# Altium PCB PCB1v3.PcbDoc
Units mm, origin at the board's own origin, x right, y up, seen from the top; angles counter-clockwise.
Board outline 58.42 x 57.15 mm, 2 copper layers (Top Layer, Bottom Layer); 52 components, 86 nets, 259 pads, 249 vias.
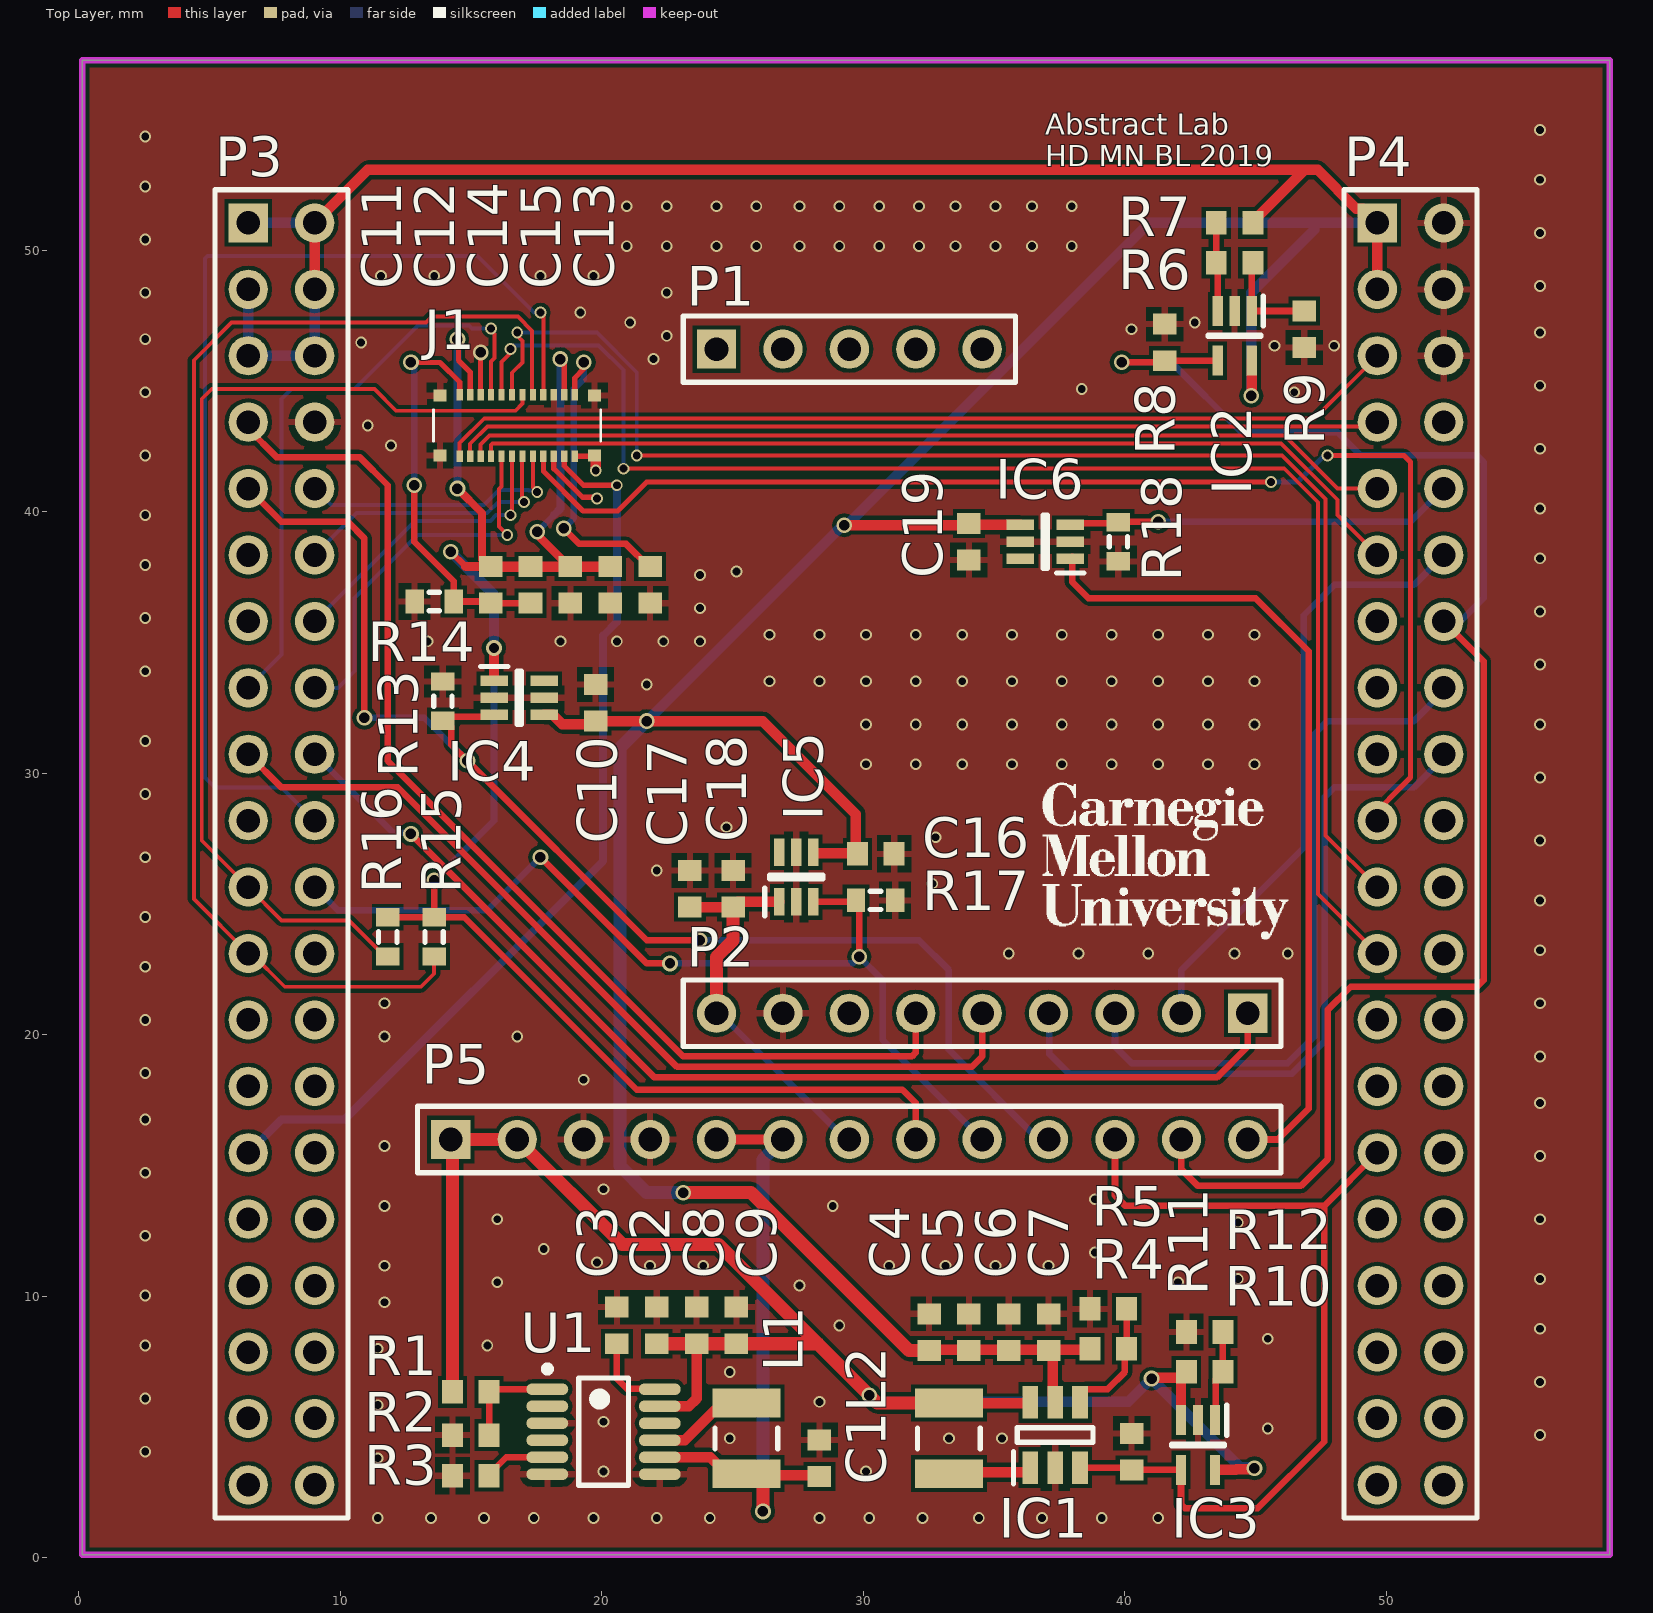
[diagram p0: Top Layer view]
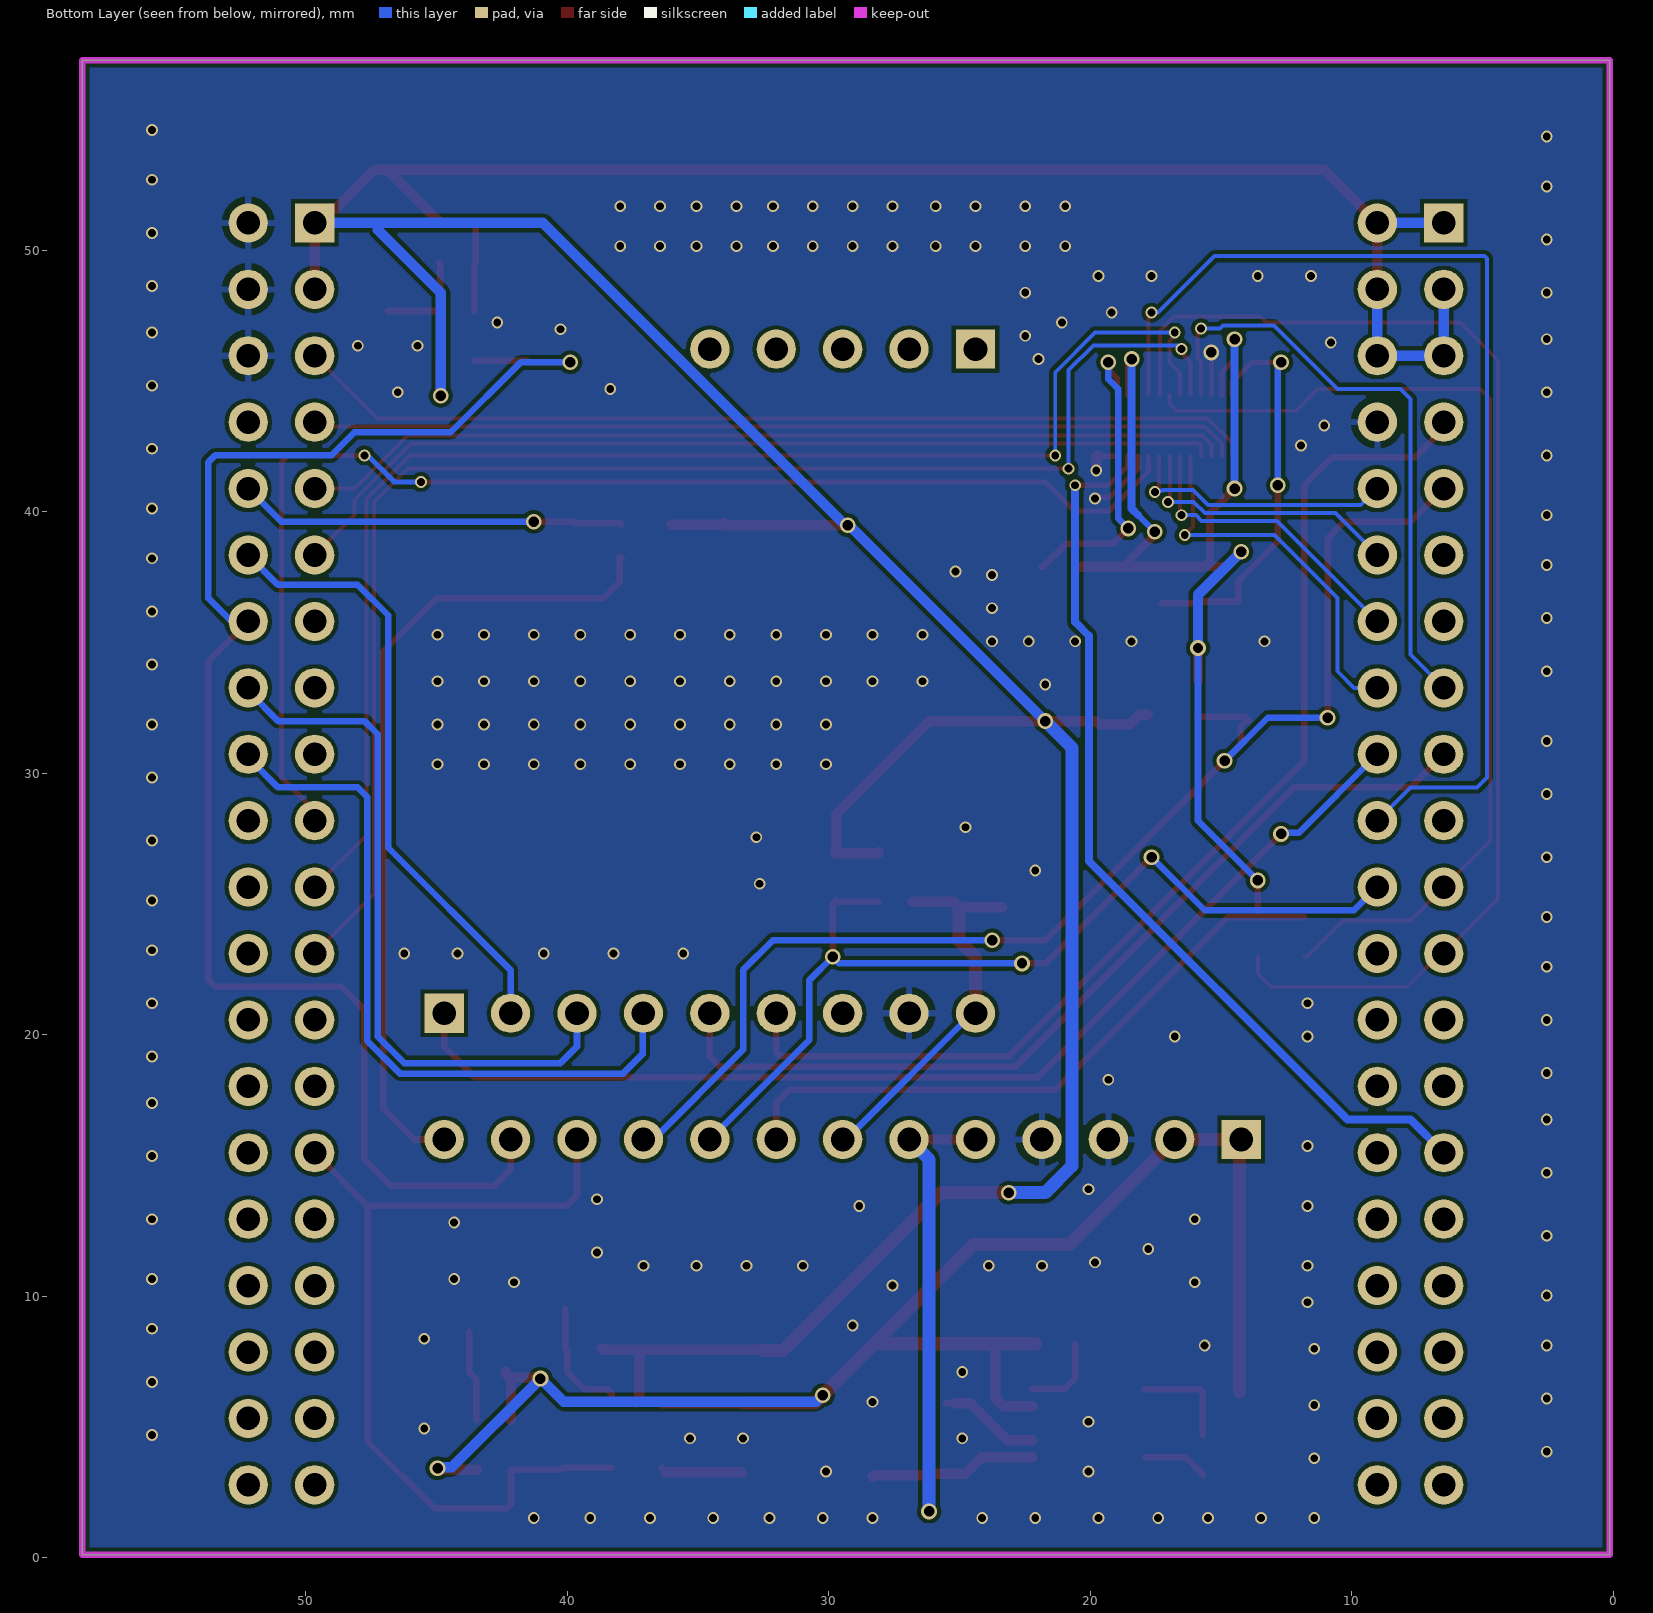
[diagram p1: Bottom Layer view, seen from below]

## Layer stack, top to bottom
Top Solder: solder mask 0.0102, Solder Resist, Dk 3.5
Top Layer: signal copper 0.0356
Dielectric 1: dielectric 0.32, FR-4, Dk 4.8
Bottom Layer: signal copper 0.0356
Bottom Solder: solder mask 0.0102, Solder Resist, Dk 3.5

## Board outline
0.127,0.127 58.547,0.127 58.547,57.277 0.127,57.277

## Design rules (kind name [scope] priority, off if disabled: settings)
Clearance [All] p1: gap=0.15 ignorepadtopadclearanceinfootprint=FALSE
PlaneConnect [All] p1: pad.planeconnectstyle=Relief pad.reliefexpansion=0.508 pad.reliefentries=4 pad.reliefconductorwidth=0.254 pad.reliefairgap=0.254 via.planeconnectstyle=Direct via.reliefexpansion=0.508 via.reliefentries=4 via.reliefconductorwidth=0.254 via.reliefairgap=0.254
PolygonConnect [All] p1: thpad.connectstyle=Relief thpad.reliefconductorwidth=0.254 thpad.reliefentries=4 thpad.polygonreliefangle="90 Angle" thpad.airgapwidth=0.254 smdpad.connectstyle=Relief smdpad.reliefconductorwidth=0.254 smdpad.reliefentries=4 smdpad.polygonreliefangle="90 Angle" smdpad.airgapwidth=0.254 via.connectstyle=Direct via.reliefconductorwidth=0.254 via.reliefentries=4 via.polygonreliefangle="90 Angle" via.airgapwidth=0.254
RoutingVias NoNet [InNet('No Net')] p1: holewidth=0.4 width=0.6 viastyle="Through Hole" minholewidth=0.3 minwidth=0.45 maxholewidth=1 maxwidth=1.15
RoutingVias Camera [(InNet('NetJ1_1') OR InNet('NetJ1_3') OR InNet('NetJ1_5') OR InNet('NetJ1_7') OR InNet('NetJ1_9') OR InNet('NetJ1_11') OR InNet('NetJ1_13') OR InNet('NetJ1_15') OR InNet('NetJ1_17') OR InNet('NetJ1_17') OR InNet('NetJ1_21')) OR InNet('NetJ1_2') OR InNet('NetJ1_8') OR InNet('NetJ1_10') OR InNet('NetJ1_12') OR InNet('NetJ1_14') OR InNet('NetJ1_16') OR InNet('NetJ1_18') OR InNet('NetC9_2') OR InNet('NetC12_2')] p2: holewidth=0.3 width=0.45 viastyle="Through Hole" minholewidth=0.3 minwidth=0.45 maxholewidth=6.3 maxwidth=7.45
RoutingVias RoutingVias_1 [All] p3: holewidth=0.4 width=0.6 viastyle="Through Hole" minholewidth=0.3 minwidth=0.45 maxholewidth=6.3 maxwidth=7.45
SolderMaskExpansion [All] p1: expansion=0.102
Width Power [(InNet('VCC') OR InNet('GND') OR InNet('VCAP')OR InNet('V_HARVEST'))] p1: maxlimit=1 minlimit=0.2 preferedwidth=0.4
Width "Camera Socket" [(InNet('NetJ1_1') OR InNet('NetJ1_3') OR InNet('NetJ1_5') OR InNet('NetJ1_7') OR InNet('NetJ1_9') OR InNet('NetJ1_11') OR InNet('NetJ1_13') OR InNet('NetJ1_15') OR InNet('NetJ1_17') OR InNet('NetJ1_17') OR InNet('NetJ1_21')) OR InNet('NetJ1_2') OR InNet('NetJ1_8') OR InNet('NetJ1_10') OR InNet('NetJ1_12') OR InNet('NetJ1_14') OR InNet('NetJ1_16') OR InNet('NetJ1_18') OR InNet('NetC9_2') OR InNet('NetC12_2')] p2: maxlimit=0.3 minlimit=0.15 preferedwidth=0.15
Width [All] p3: maxlimit=1 minlimit=0.15 preferedwidth=0.25
29 further rules are at their usual default settings.

## Components (designator, comment, footprint, x,y, rotation, side; value= is the part's Value field where it differs from the comment)
C1 "Cap" 1608[0603] 28.321,3.81 r270 top value=10uF
C2 "Cap" 1608[0603] 22.098,8.89 r270 top value=10uF
C3 "Cap" 1608[0603] 20.574,8.89 r270 top value=1uF
C4 "Cap" 1608[0603] 32.512,8.636 r270 top value=0.1uF
C5 "Cap" 1608[0603] 34.036,8.636 r270 top value=1uF
C6 "Cap" 1608[0603] 35.56,8.636 r270 top value=10uF
C7 "Cap" 1608[0603] 37.084,8.636 r270 top value=10uF
C8 "Cap" 1608[0603] 23.622,8.89 r270 top value=0.1uF
C9 "Cap" 1608[0603] 25.146,8.89 r270 top value=1uF
C10 "Cap" 1608[0603] 19.76,32.704 r270 top value=10uF
C11 "Cap" 1608[0603] 15.748,37.211 r90 top value=0.1uF
C12 "Cap" 1608[0603] 17.272,37.211 r90 top value=10uF
C13 "Cap" 1608[0603] 21.844,37.211 r90 top value=0.1uF
C14 "Cap" 1608[0603] 18.796,37.211 r90 top value=0.1uF
C15 "Cap" 1608[0603] 20.32,37.211 r90 top value=10uF
C16 "Cap" 1608[0603] 30.48,26.924 r180 top value=10uF
C17 "Cap" 1608[0603] 23.368,25.592 r270 top value=10uF
C18 "Cap" 1608[0603] 25.019,25.589 r270 top value=1uF
C19 "Cap" 1608[0603] 34.036,38.862 r90 top value=10uF
IC1 "TPS61070DDCR" SOT95P280X110-6N 37.338,4.699 r90 top
IC2 "MIC841HYC5-TR" SOT65P210X110-5N 44.196,46.736 r270 top
IC3 "MIC841HYC5-TR" SOT65P210X110-5N 42.799,4.318 r270 top
IC4 "SIP32431DR3-T1GE3" SOT65P210X110-6N 16.839,32.893 r0 top
IC5 "SIP32431DR3-T1GE3" SOT65P210X110-6N 27.432,26.035 r90 top
IC6 "SIP32431DR3-T1GE3" SOT65P210X110-6N 36.957,38.862 r180 top
J1 "503772-2420" 5037722410 16.764,43.307 r0 top
L1 "Inductor" C1210 25.527,4.572 r90 top value=10uH
L2 "Inductor" C1210 33.274,4.572 r90 top value=4.7uH
P1 "Header 5" HDR1X5 24.384,46.228 r0 top locked
P2 "Header 9" HDR1X9 44.704,20.828 r180 top locked
P3 "Header 20X2" HDR2X20 6.477,51.054 r270 top locked
P4 "Header 20X2" HDR2X20 49.657,51.054 r270 top locked
P5 "Header 13" HDR1X13 14.224,16.002 r0 top
R1 "Res3" 1608[0603] 14.986,6.35 r180 top value=2M
R2 "Res3" 1608[0603] 14.986,4.699 r0 top value=1M
R3 "Res3" 1608[0603] 14.986,3.14 r0 top value=150K
R4 "Res3" 1608[0603] 39.37,8.001 r180 top value=1.96M
R5 "Res3" 1608[0603] 39.37,9.525 r0 top value=392K
R6 "Res3" 1608[0603] 44.196,49.53 r180 top value=453k
R7 "Res3" 1608[0603] 44.196,51.054 r0 top value=1.3M
R8 "Res3" 1608[0603] 41.529,46.482 r270 top value=2M
R9 "Res3" 1608[0603] 46.863,46.99 r90 top value=1.24M
R10 "Res3" 1608[0603] 43.053,7.115 r180 top value=1.74M
R11 "Res3" 1608[0603] 40.259,4.064 r270 top value=2M
R12 "Res3" 1608[0603] 43.053,8.639 r0 top value=1.24M
R13 "Res3" J1-0603 13.918,32.766 r270 top value=2M
R14 "Res3" J1-0603 13.589,36.576 r180 top value=0
R15 "Res3" J1-0603 13.589,23.749 r90 top value=4.7k
R16 "Res3" J1-0603 11.811,23.749 r90 top value=4.7k
R17 "Res3" J1-0603 30.468,25.146 r180 top value=2M
R18 "Res3" J1-0603 39.751,38.862 r90 top value=2M
U1 "LTC3105EMS#PBF" LT-MS-12_N 20.066,4.826 r0 top

## Footprints (in the part's own frame and the unit in brackets; to place one, negate y for a bottom-side part, rotate by r counter-clockwise, add the part's x,y. Pads: shape width x height; smd on the part's side, far side on the other; paste and mask are expansions set on the pad)
1608[0603] [mm] "Chip Capacitor, Body 1.6x0.8mm, IPC High Density"
  rect 0.8x0.9 smd: 1(-0.7,0) 2(0.7,0)
  body extent -0.87,-0.48 0.87,0.48, height 1.3
5037722410 [mm]
  rect 0.24x0.45 smd: 1(-2.2,-1.175) 2(-2.2,1.175) 3(-1.8,-1.175) 4(-1.8,1.175) 5(-1.4,-1.175) 6(-1.4,1.175) 7(-1,-1.175) 8(-1,1.175) 9(-0.6,-1.175) 10(-0.6,1.175) 11(-0.2,-1.175) 12(-0.2,1.175) 13(0.2,-1.175) 14(0.2,1.175) 15(0.6,-1.175) 16(0.6,1.175) 17(1,-1.175) 18(1,1.175) 19(1.4,-1.175) 20(1.4,1.175) 21(1.8,-1.175) 22(1.8,1.175) 23(2.2,-1.175) 24(2.2,1.175)
  rect 0.5x0.47 smd: FN1(-2.95,1.145) FN2(-2.95,-1.145) FN3(2.95,-1.145) FN4(2.95,1.145)
  silkscreen extent -3.2,-0.6 3.2,0.6
C1210 [mm] "Chip Capacitor, Body 3.2x2.5mm, IPC High Density"
  rect 1.1x2.6 smd: 1(-1.35,0) 2(1.35,0)
  silkscreen extent -0.4,-1.2 0.4,1.2, body extent -1.7,-1.35 1.7,1.35, height 1.3
HDR1X5 [mm] "Connector; Header; 5 Position"
  rect 1.5x1.5 hole 0.9: 1(0,0)
  round 1.5 hole 0.9: 2(2.54,0) 3(5.08,0) 4(7.62,0) 5(10.16,0)
  silkscreen extent -1.27,-1.27 11.43,1.27
HDR1X9 [mm] "Connector; Header; 9 Position"
  rect 1.5x1.5 hole 0.9: 1(0,0)
  round 1.5 hole 0.9: 2(2.54,0) 3(5.08,0) 4(7.62,0) 5(10.16,0) 6(12.7,0) 7(15.24,0) 8(17.78,0) 9(20.32,0)
  silkscreen extent -1.27,-1.27 21.59,1.27
HDR1X13 [mm] "Connector; Header; 13 Position"
  rect 1.5x1.5 hole 0.9: 1(0,0)
  round 1.5 hole 0.9: 2(2.54,0) 3(5.08,0) 4(7.62,0) 5(10.16,0) 6(12.7,0) 7(15.24,0) 8(17.78,0) 9(20.32,0) 10(22.86,0) 11(25.4,0) 12(27.94,0) 13(30.48,0)
  silkscreen extent -1.27,-1.27 31.75,1.27
HDR2X20 [mm] "Connector; Header; 20x2 Position"
  rect 1.5x1.5 hole 0.9: 1(0,0)
  round 1.5 hole 0.9: 2(0,2.54) 3(2.54,0) 4(2.54,2.54) 5(5.08,0) 6(5.08,2.54) 7(7.62,0) 8(7.62,2.54) 9(10.16,0) 10(10.16,2.54) 11(12.7,0) 12(12.7,2.54) 13(15.24,0) 14(15.24,2.54) 15(17.78,0) 16(17.78,2.54) 17(20.32,0) 18(20.32,2.54) 19(22.86,0) 20(22.86,2.54) 21(25.4,0) 22(25.4,2.54) 23(27.94,0) 24(27.94,2.54) 25(30.48,0) 26(30.48,2.54) 27(33.02,0) 28(33.02,2.54) 29(35.56,0) 30(35.56,2.54) 31(38.1,0) 32(38.1,2.54) 33(40.64,0) 34(40.64,2.54) 35(43.18,0) 36(43.18,2.54) 37(45.72,0) 38(45.72,2.54) 39(48.26,0) 40(48.26,2.54)
  silkscreen extent -1.27,-1.27 49.53,3.81
J1-0603 [mm] "Chip Resistor, Body 1.6x0.8mm, IPC High Density"
  rect 0.7x0.9 smd: 1(-0.75,0) 2(0.75,0)
  silkscreen extent -0.2,-0.35 0.2,0.35, body extent -0.85,-0.48 0.85,0.48, height 0.9
LT-MS-12_N [mm] "SOP, 12-Leads, Body 4.1x3.1mm, Pitch 0.65mm, IPC Medium Density"
  oval 1.6x0.45 smd: 1(-2.15,1.625) 2(-2.15,0.975) 3(-2.15,0.325) 4(-2.15,-0.325) 5(-2.15,-0.975) 6(-2.15,-1.625) 7(2.15,-1.625) 8(2.15,-0.975) 9(2.15,-0.325) 10(2.15,0.325) 11(2.15,0.975) 12(2.15,1.625)
  silkscreen extent -2.27,-2.05 0.95,2.52, body extent -1.55,-2.05 1.55,2.05, height 1.1
SOT65P210X110-5N [mm]
  rect 1.15x0.4 smd: 1(-0.95,0.65) 2(-0.95,0) 3(-0.95,-0.65) 4(0.95,-0.65) 5(0.95,0.65)
  silkscreen extent -1.53,-1.01 0.03,1.1, body extent -1.05,-1.01 1.05,1.01, height 1.1
SOT65P210X110-6N [mm]
  rect 1.05x0.4 smd: 1(-0.95,0.65) 2(-0.95,0) 3(-0.95,-0.65) 4(0.95,-0.65) 5(0.95,0) 6(0.95,0.65)
  silkscreen extent -1.48,-1.01 0.08,1.2, body extent -1.05,-1.01 1.05,1.01, height 1.1
SOT95P280X110-6N [mm]
  rect 1.25x0.6 smd: 1(-1.25,0.95) 2(-1.25,0) 3(-1.25,-0.95) 4(1.25,-0.95) 5(1.25,0) 6(1.25,0.95)
  silkscreen extent -1.88,-1.45 0.28,1.6, body extent -1.4,-1.45 1.4,1.45, height 1.1

## Part data
C1 C2 C3 C4 C5 C6 C7 C8 C9 C10 C11 C12 C13 C14 C15 C16 C17 C18 C19: "CAP CER 6.3V X5R/X7R 0603", PackageDescription="Chip Capacitor, Body 1.6x0.8mm, IPC High Density", PackageReference=0603, Publisher="Altium Limited"
IC1: "90% Efficient Synchronous Boost Converter With 600-mA Switch", Manufacturer_Name="Texas Instruments", Mouser Part Number=595-TPS61070DDCR, ComponentLink1Description="Manufacturer URL", ComponentLink1URL=www.ti.com, ComponentLink2Description="Package Specification", ComponentLink2URL=http://www.ti.com/lit/ml/mpds026l/mpds026l.pdf, ComponentLink3Description=Datasheet, ComponentLink3URL=http://www.ti.com/lit/ds/symlink/tps61070.pdf, Datasheet Link=http://www.ti.com/lit/ds/symlink/tps61070.pdf, Height=1.1mm, Manufacturer_Part_Number=TPS61070DDCR, Mouser Price/Stock=https://www.mouser.com/Search/Refine.aspx?Keyword=595-TPS61070DDCR
IC2 IC3: "Comparator with 1.25% Reference and Adjustable Hysteresis", Manufacturer_Name=Microchip, Mouser Part Number=998-MIC841HYC5TR, RS Part Number=1654292, ComponentLink2Description="Package Specification", ComponentLink2URL=http://94.251.15.129/chip/ChipDoc.nsf/Package/4907A36056EE3CAB47257B96006A2837!OpenDocument, Datasheet Link=http://ww1.microchip.com/downloads/en/devicedoc/20005758a.pdf, Height=1.1mm, Manufacturer_Part_Number=MIC841HYC5-TR, RS Price/Stock=http://uk.rs-online.com/web/p/products/1654292
  IC2: ComponentLink1Description="Manufacturer URL", ComponentLink1URL=https://www.microchip.com, ComponentLink3Description=Datasheet, ComponentLink3URL=http://ww1.microchip.com/downloads/en/devicedoc/20005758a.pdf
  IC3: ComponentLink1Description=Datasheet, ComponentLink1URL=http://ww1.microchip.com/downloads/en/devicedoc/20005758a.pdf, ComponentLink3Description="Manufacturer URL", ComponentLink3URL=https://www.microchip.com
IC4 IC5 IC6: "10 pA, Ultra Low Leakage and Quiescent Current, / Load Switch with Reverse Blocking", Manufacturer_Name=Vishay, Mouser Part Number=781-SIP32431DR3-GE3, ComponentLink1Description=Datasheet, ComponentLink1URL=https://www.vishay.com/docs/66597/sip32431.pdf, ComponentLink2Description="Package Specification", ComponentLink2URL=https://www.vishay.com/docs/71154/71154.pdf, ComponentLink3Description="Manufacturer URL", ComponentLink3URL=https://www.vishay.com, Datasheet Link=https://componentsearchengine.com/Datasheets/1/SIP32431DR3-T1GE3.pdf, Height=1.1mm, Manufacturer_Part_Number=SIP32431DR3-T1GE3, Mouser Price/Stock=https://www.mouser.com/Search/Refine.aspx?Keyword=781-SIP32431DR3-GE3
J1: library part 503772-2410, "SlimStack Board-to-Board Connector. 0.40mm Pitch, B8 Series, Receptacle, 0.80mm Mated Height, 2.50mm Mated Width, 24 Circuits", Manufacturer_Name=Molex, Mouser Part Number=538-503772-2410, ComponentLink1Description="Package Specification", ComponentLink1URL=https://www.molex.com/pdm_docs/sd/5037722420_sd.pdf, ComponentLink2Description="Manufacturer URL", ComponentLink2URL=https://www.molex.com, ComponentLink3Description=Datasheet, ComponentLink3URL=https://www.molex.com/webdocs/datasheets/pdf/en-us/5037722420_PCB_RECEPTACLES.pdf, Datasheet Link=https://componentsearchengine.com/Datasheets/1/503772-2410.pdf, Height=0.76mm, Manufacturer_Part_Number=503772-2410, Mouser Price/Stock=https://www.mouser.com/Search/Refine.aspx?Keyword=538-503772-2410
P1: "Header, 5-Pin", LatestRevisionDate=17-Jul-2002, LatestRevisionNote="Re-released for DXP Platform.", Publisher="Altium Limited"
P2: "Header, 9-Pin", LatestRevisionDate=17-Jul-2002, LatestRevisionNote="Re-released for DXP Platform.", Publisher="Altium Limited"
P3 P4: "Header, 20-Pin, Dual row", LatestRevisionDate=17-Jul-2002, LatestRevisionNote="Re-released for DXP Platform.", Publisher="Altium Limited"
P5: "Header, 13-Pin", LatestRevisionDate=17-Jul-2002, LatestRevisionNote="Re-released for DXP Platform.", Publisher="Altium Limited"
R1 R2 R3 R4 R5 R6 R7 R8 R9 R10 R11 R12 R13 R14 R15 R16 R17 R18: "RES 1/10W 1% 0603 SMD", PackageDescription="Chip Resistor, Body 1.6x0.8mm, IPC High Density", PackageReference=0603, Publisher="Altium Limited"
U1: library part CMP-0473-00104-1, "400 mA Step-Up DC/DC Converter with Maximum Power Point Control and 250 mV Start-Up, 12-pin SOP (MS-12), -40 to 85 degC, Pb-Free", Manufacturer="Linear Technology", ComponentLink1Description="Manufacturer URL", ComponentLink1URL=http://www.linear.com/, ComponentLink2Description=Datasheet, ComponentLink2URL=https://www.analog.com/media/en/technical-documentation/data-sheets/3105fb.pdf, ComponentLink3Description="Package Specification", ComponentLink3URL=http://cds.linear.com/docs/en/packaging/05081668_A_MS12.pdf, DatasheetVersion="Rev. A", Energy Source=Solar, Mounting Technology="Surface Mount", Number of Outputs=1, PackageDescription="12-Pin Plastic MSOP, Body 4.039 x 3 mm, Pitch 0.65 mm", PackageReference=MS-12, PackageVersion="Rev. A, 05/2013", PartNumber=LTC3105EMS#PBF, RoHS=TRUE, Topology=Boost, Vin Max(V)=5, Vin Min(V)=0.225, Vout Max(V)=5.25
L1: Code_IEC=3225, Code_JEITA=1210, LatestRevisionDate=29-May-2009, LatestRevisionNote="IPC-7351 Footprint Added.", PackageDescription="Chip Inductor", PackageReference=1210, Part=CBC3225T100KR, Published=8-Jun-2000, Publisher="Altium Limited"
L2: Code_IEC=3225, Code_JEITA=1210, LatestRevisionDate=29-May-2009, LatestRevisionNote="IPC-7351 Footprint Added.", PackageDescription="Chip Inductor", PackageReference=1210, Part=CBC3225T4R7MR, Published=8-Jun-2000, Publisher="Altium Limited"

## Via types
v1: diameter 0.45, hole 0.3, Top Layer to Bottom Layer, tented both sides, 220 vias
v2: diameter 0.6, hole 0.4, Top Layer to Bottom Layer, tented both sides, 29 vias

## Nets (pads, with @x,y where several pads share a name; then routed paths per layer and width w, separated by ;. In a path a pad name is that pad's centre, name@x,y a point inside that pad or via, vN(x,y) a via of type N, cw(c..) or ccw(c..) an arc to the next point about the centre after c; other vN are vias at no path point)
CAM_EN: IC4.3 P3.9 P5.10 R13.2 | length 50.8
  Top Layer w0.25: P3.9 7.747,39.624 10.287,39.624 10.922,38.989 v2(10.922,32.131) ; IC4.3 15.814,32.168 14.07,32.168 R13.2 14.018,32.016 14.243,31.791 14.243,31.096 v2(14.859,30.48) 21.717,23.622 v2(23.749,23.622)
  Bottom Layer w0.25: v2(10.922,32.131) 13.208,32.131 v2(14.859,30.48) ; v2(23.749,23.622) 32.131,23.622 33.274,22.479 33.274,19.431 36.703,16.002 P5.10
CAM_VCC: C11.2 C12.2 C14.2 C15.2 IC4.1 J1.4 J1.22 P5.8 R15.2 R16.2 | length 69.5
  Top Layer w0.2: v2(14.478,46.609) 14.52,46.567 14.52,45.792 14.964,45.348 J1.4 ; v2(18.415,45.847) 18.564,45.698 J1.22
  Top Layer w0.25: R16.2 R15.2 ; v2(13.589,25.908) R15.2 ; v2(14.224,38.481) 14.794,37.911 ; C11.2@15.423,38.186 15.698,37.911 C11.2 ; IC4.1@15.875,33.557 IC4.1 ; v2(17.526,39.243) 17.593,39.176 v2@17.593,39.064 ; C14.2@18.746,37.911 C14.2 ; P5.8 32.004,17.399 31.496,17.907 21.336,17.907 14.738,24.505 13.595,24.505 R15.2
  Top Layer w0.3: v2(14.478,40.894) 15.423,39.949 C11.2@15.423,38.186 ; v2@17.593,39.064 C14.2@18.746,37.911
  Top Layer w0.35: 14.794,37.911 C11.2@15.698,37.911
  Top Layer w0.4: C11.2 C12.2 C14.2@18.746,37.911 ; IC4.1@15.875,33.557 v2(15.875,34.798) ; C14.2 C15.2
  Bottom Layer w0.25: v2(13.589,25.908) 15.875,28.194 v2(15.875,34.798) ; v2(17.526,39.243) 18.161,39.878
  Bottom Layer w0.3: v2(14.478,40.894) v2(14.478,46.609) ; 18.161,39.878 18.415,40.132 v2(18.415,45.847)
  Bottom Layer w0.4: v2(14.224,38.481) 15.875,36.83 v2(15.875,34.798)
GND: C1.1 C2.1 C3.1 C4.1 C5.1 C6.1 C7.1 C8.1 C9.1 C10.1 C13.1 C14.1 C15.1 C16.1 C17.1 C18.1 C19.1 IC1.2 IC2.2 IC3.2 IC4.2 IC4.5 IC5.2 IC5.5 IC6.2 IC6.5 J1.6 J1.19 J1.20 J1.23 J1.FN1 J1.FN2 J1.FN3 J1.FN4 P2.8 P3.8 P4.2 P4.4 P4.6 P5.3 P5.4 R2.1 R3.1 R5.1 R8.1 R9.1 R11.1 R12.1 R13.1 R14.2 R17.1 R18.1 U1.3 U1.6 U1.7 | length 5.6
  Top Layer w0.2: J1.6 v2@15.364,46.098 ; J1.19 18.164,41.653 19.256,40.561 19.764,40.561 v1(19.812,40.513) ; J1.23 J1.FN3@19.714,42.132
  Top Layer w0.254: v2@15.364,46.098 v2(15.367,46.101)
  Top Layer w0.4: J1.FN3 19.729,42.162 19.764,42.127 v1(19.764,41.591)
  other v1: 11.43,1.524 13.462,1.524 15.494,1.524 17.399,1.524 19.685,1.524 22.098,1.524 24.13,1.524 28.321,1.524 30.226,1.524 32.258,1.524 34.417,1.524 36.83,1.524 39.116,1.524 41.275,1.524 20.066,3.302 30.099,3.302 11.43,3.81 2.54,4.064 24.892,4.572 33.274,4.572 35.306,4.572 55.88,4.699 45.466,4.953 20.066,5.207 11.43,5.842 28.321,5.969 2.54,6.096 55.88,6.731 24.892,7.112 11.43,8.001 2.54,8.128 15.621,8.128 45.466,8.382 55.88,8.763 29.083,8.89 11.684,9.779 2.54,10.033 27.559,10.414 16.002,10.541 42.037,10.541 44.323,10.668 55.88,10.668 11.684,11.176 21.844,11.176 23.876,11.176 30.988,11.176 33.147,11.176 35.052,11.176 37.084,11.176 19.812,11.303 38.862,11.684 17.78,11.811 2.54,12.319 44.323,12.827 16.002,12.954 55.88,12.954 11.684,13.462 28.829,13.462 38.862,13.716 20.066,14.097 2.54,14.732 55.88,15.367 11.684,15.748 2.54,16.764 55.88,17.399 19.304,18.288 2.54,18.542 55.88,19.177 11.684,19.939 16.764,19.939 2.54,20.574 11.684,21.209 55.88,21.209 2.54,22.606 35.56,23.114 38.227,23.114 40.894,23.114 44.196,23.114 46.228,23.114 55.88,23.241 2.54,24.511 55.88,25.146 32.639,25.781 22.098,26.289 2.54,26.797 55.88,27.432 32.766,27.559 24.765,27.94 2.54,29.21 55.88,29.845 30.099,30.353 32.004,30.353 33.782,30.353 35.687,30.353 37.592,30.353 39.497,30.353 41.275,30.353 43.18,30.353 44.958,30.353 2.54,31.242 30.099,31.877 32.004,31.877 33.782,31.877 35.687,31.877 37.592,31.877 39.497,31.877 41.275,31.877 43.18,31.877 44.958,31.877 55.88,31.877 21.717,33.401 26.416,33.528 28.321,33.528 30.099,33.528 32.004,33.528 33.782,33.528 35.687,33.528 37.592,33.528 39.497,33.528 41.275,33.528 43.18,33.528 44.958,33.528 2.54,33.909 55.88,34.163 13.335,35.052 18.415,35.052 20.574,35.052 22.352,35.052 23.749,35.052 26.416,35.306 28.321,35.306 30.099,35.306 32.004,35.306 33.782,35.306 35.687,35.306 37.592,35.306 39.497,35.306 41.275,35.306 43.18,35.306 44.958,35.306 2.54,35.941 55.88,36.195 23.749,36.322 23.749,37.592 25.146,37.719 2.54,37.973 55.88,38.227 2.54,39.878 55.88,40.132 2.54,42.164 55.88,42.418 11.938,42.545 11.049,43.307 2.54,44.577 46.482,44.577 38.354,44.704 55.88,44.831 21.971,45.847 45.72,46.355 48.006,46.355 10.795,46.482 2.54,46.609 22.479,46.736 55.88,46.863 40.259,46.99 21.082,47.244 42.672,47.244 19.177,47.625 2.54,48.387 22.479,48.387 55.88,48.641 11.557,49.022 13.589,49.022 17.653,49.022 19.685,49.022 20.955,50.165 22.479,50.165 24.384,50.165 25.908,50.165 27.559,50.165 29.083,50.165 30.607,50.165 32.131,50.165 33.528,50.165 35.052,50.165 36.449,50.165 37.973,50.165 2.54,50.419 55.88,50.673 20.955,51.689 22.479,51.689 24.384,51.689 25.908,51.689 27.559,51.689 29.083,51.689 30.607,51.689 32.131,51.689 33.528,51.689 35.052,51.689 36.449,51.689 37.973,51.689 2.54,52.451 55.88,52.705 2.54,54.356 55.88,54.61
MSP_RST: IC2.4 P4.14 P5.12 R8.2 | length 60.3
  Top Layer w0.25: v2(39.878,45.72) 41.467,45.72 R8.2 41.533,45.786 IC2.4 ; P5.12@42.291,16.002 P5.12 42.164,14.859 42.799,14.224 46.736,14.224 47.752,15.24 47.752,20.955 48.641,21.844 53.467,21.844 53.721,22.098 53.721,34.29 P4.14
  Bottom Layer w0.25: v2(39.878,45.72) 41.783,45.72 44.45,43.053 48.133,43.053 49.022,42.164 53.467,42.164 53.721,41.91 53.721,36.703 52.832,35.814 P4.14
NetC3_2: C3.2 U1.12 | length 3.1
  Top Layer w0.25: C3.2 20.574,6.858 20.955,6.477 22.19,6.477 U1.12
NetC11_1: C11.1 C12.1 J1.2 R14.1 | length 15.4
  Top Layer w0.2: v2(12.7,45.72) 13.812,45.72 14.564,44.968 J1.2
  Top Layer w0.25: v2(12.827,41.021) 12.827,38.862 14.339,37.35 R14.1 15.683,36.576 C11.1 C12.1
  Bottom Layer w0.25: v2(12.7,45.72) 12.827,45.593 v2(12.827,41.021)
NetC13_2: C13.2 J1.24 | length 12
  Top Layer w0.2: J1.24 18.964,45.126 19.304,45.466 v2(19.304,45.72)
  Top Layer w0.25: v2(18.542,39.37) 19.134,38.778 20.927,38.778 21.794,37.911 C13.2
  Bottom Layer w0.25: v2(18.542,39.37) 18.923,39.751 18.923,44.704 19.304,45.085 v2(19.304,45.72)
NetIC1_1: IC1.1 L2.1 | length 3.2
  Top Layer w0.25: L2.1 L2.1@33.326,3.274 ; IC1.1@36.213,3.274 IC1.1
  Top Layer w0.4: L2.1@33.326,3.274 IC1.1@36.213,3.274
NetIC1_4: IC1.4 R4.1 R5.2 | length 4.8
  Top Layer w0.25: IC1.4 38.288,6.274 38.463,6.449 39.342,6.449 40.005,7.112 40.005,7.936 R4.1 R5.2
NetIC2_1: IC2.1 R6.1 R9.2 | length 3.9
  Top Layer w0.25: R6.1 44.846,49.48 IC2.1 46.859,47.686 R9.2
NetIC2_3: IC2.3 R6.2 R7.1 | length 3.4
  Top Layer w0.25: R7.1 R6.2 43.546,49.48 IC2.3
NetIC3_1: IC3.1 R10.1 R12.2 | length 3.5
  Top Layer w0.25: IC3.1 43.478,5.297 43.478,6.84 R10.1 R12.2
NetIC6_1: IC6.1 P5.13 | length 31.5
  Top Layer w0.25: IC6.1 37.982,38.287 37.982,37.329 38.608,36.703 44.999,36.703 47.031,34.671 47.031,17.186 45.847,16.002 P5.13
NetIC6_3: IC6.3 P4.10 R18.2 | length 14.9
  Top Layer w0.25: IC6.3 37.957,39.562 39.701,39.562 R18.2 39.763,39.624 v2(41.275,39.624)
  Bottom Layer w0.25: v2(41.275,39.624) 50.927,39.624 P4.10
NetJ1_1: J1.1 P4.5 | length 37
  Top Layer w0.15: J1.1 14.564,42.634 15.502,43.572 47.255,43.572 P4.5
NetJ1_3: J1.3 P4.7 | length 35.5
  Top Layer w0.15: J1.3 14.964,42.61 15.626,43.272 49.495,43.272 P4.7
NetJ1_5: J1.5 P4.9 | length 35.7
  Top Layer w0.15: J1.5 15.364,42.585 15.701,42.922 46.104,42.922 48.132,40.894 P4.9
NetJ1_7: J1.7 P4.11 | length 36.5
  Top Layer w0.15: J1.7 15.764,42.561 15.825,42.622 45.979,42.622 48.133,40.468 48.133,39.878 P4.11
NetJ1_8: J1.8 P3.15 | length 23.6
  Top Layer w0.15: J1.8 15.764,45.756 15.892,45.884 15.892,46.811 15.764,46.939 v1(15.764,47.02)
  Bottom Layer w0.15: P3.15 7.747,34.544 7.747,44.323 8.128,44.704 10.541,44.704 12.971,47.134 14.915,47.134 15.029,47.02 v1(15.764,47.02) v1@15.65,47.134
NetJ1_9: J1.9 P3.16 | length 14.7
  Top Layer w0.15: J1.9 16.164,40.975 16.06,40.871 16.06,39.439 v1(16.383,39.116)
  Bottom Layer w0.15: P3.16 9.906,33.274 10.541,33.909 10.541,36.703 12.954,39.116 v1(16.383,39.116) v1@16.383,38.989
NetJ1_10: J1.10 P4.23 | length 55.7
  Top Layer w0.15: J1.10 16.164,45.731 16.51,46.077 v1(16.51,46.228) ; v1(20.828,41.656) 46.097,41.656 47.381,40.372 47.381,25.39 P4.23
  Bottom Layer w0.15: v1(16.51,46.228) 16.654,46.372 19.879,46.372 20.828,45.423 v1(20.828,41.656)
NetJ1_11: J1.11 P3.14 | length 11.6
  Top Layer w0.15: v1(16.51,39.878) 16.564,39.932 J1.11
  Bottom Layer w0.15: P3.14@9.017,35.987 P3.14 12.862,39.659 15.738,39.659 15.957,39.878 v1(16.51,39.878)
NetJ1_12: J1.12 P4.21 | length 53.7
  Top Layer w0.15: J1.12 16.564,45.325 16.96,45.721 16.96,46.54 16.764,46.736 v1(16.764,46.863) ; v1(21.336,42.164) 46.013,42.164 47.681,40.496 47.681,27.63 P4.21
  Bottom Layer w0.15: v1(16.764,46.863) 19.812,46.863 21.336,45.339 v1(21.336,42.164)
NetJ1_13: J1.13 P3.12 | length 10.6
  Top Layer w0.15: J1.13 16.949,42.117 16.949,40.455 v1(17.018,40.386)
  Bottom Layer w0.15: P3.12 10.622,39.959 15.613,39.959 16.04,40.386 v1(17.018,40.386)
NetJ1_14: J1.14 P3.21 R16.1 | length 39.1
  Top Layer w0.15: R16.1 11.711,22.999 10.326,24.384 7.747,24.384 P3.21 4.699,27.432 4.699,44.323 5.08,44.704 11.303,44.704 12.135,43.872 16.694,43.872 16.964,44.142 J1.14
NetJ1_15: J1.15 P3.10 | length 10.5
  Top Layer w0.15: J1.15 17.364,40.929 v1(17.526,40.767)
  Bottom Layer w0.15: P3.10 9.652,40.259 15.489,40.259 16.066,40.836 17.204,40.836 17.216,40.824 17.469,40.824 v1(17.526,40.767)
NetJ1_16: J1.16 P3.23 R15.1 | length 48.4
  Top Layer w0.15: R15.1 13.589,22.352 13.081,21.844 7.874,21.844 6.604,23.114 P3.23 4.399,25.192 4.399,45.801 5.842,47.244 13.27,47.244 13.495,47.47 16.794,47.47 17.336,46.927 17.336,44.51 J1.16
NetJ1_17: J1.17 P4.19 | length 50.1
  Top Layer w0.2: J1.17 17.764,41.558 19.284,40.038 20.607,40.038 21.717,41.148 v1(45.593,41.148) ; v1(47.752,42.164) 50.673,42.164 50.927,41.91 50.927,29.845 49.276,28.194 P4.19
  Bottom Layer w0.2: v1(45.593,41.148) 46.609,41.148 47.625,42.164 v1(47.752,42.164)
NetJ1_18: J1.18 P3.20 | length 41.7
  Top Layer w0.15: v1(17.653,47.625) 17.764,47.514 J1.18
  Bottom Layer w0.15: P3.20 7.747,29.464 5.207,29.464 4.826,29.845 4.826,49.696 4.914,49.784 15.24,49.784 17.399,47.625 v1(17.653,47.625)
NetJ1_21: J1.21 P3.29 | length 35.5
  Top Layer w0.2: J1.21 18.564,41.761 19.304,41.021 v1(20.574,41.021)
  Bottom Layer w0.3: P3.29 7.747,16.764 10.16,16.764 20.049,26.653 20.049,35.269 20.574,35.794 v1(20.574,41.021)
NetL1_2: L1.2 U1.9 | length 3.9
  Top Layer w0.25: L1.2@25.19,5.922 L1.2
  Top Layer w0.4: U1.9 23.17,4.501 24.591,5.922 L1.2@25.19,5.922
NetP2_1: P2.1 P3.18 | length 42.6
  Top Layer w0.25: v2(12.7,27.686) 22.009,18.377 43.523,18.377 44.704,19.558 P2.1
  Bottom Layer w0.25: P3.18 12.025,27.726 12.66,27.726 v2(12.7,27.686)
NetP2_2: P2.2 P4.12 | length 23.5
  Bottom Layer w0.25: P2.2 42.164,22.479 46.844,27.159 46.844,36.049 48.006,37.211 51.054,37.211 P4.12
NetP2_3: P2.3 P4.16 | length 26.9
  Bottom Layer w0.25: P2.3 39.624,19.558 40.259,18.923 46.228,18.923 47.244,19.939 47.244,31.496 47.752,32.004 51.054,32.004 52.162,33.112 52.162,33.239 P4.16
NetP2_4: P2.4 P4.18 | length 27.6
  Bottom Layer w0.25: P2.4 37.119,20.793 37.119,19.269 37.865,18.523 46.394,18.523 47.644,19.773 47.644,29.102 48.006,29.464 51.054,29.464 52.162,30.572 52.162,30.699 P4.18
NetP2_5: P2.5 P3.17 | length 34.8
  Top Layer w0.25: P3.17 7.747,29.464 12.192,29.464 22.879,18.777 34.144,18.777 34.544,19.177 P2.5
NetP2_6: P2.6 P3.7 | length 43.5
  Top Layer w0.25: P3.7 6.477,43.18 7.556,42.1 10.731,42.1 11.811,41.021 11.811,30.48 23.114,19.177 31.858,19.177 32.004,19.323 P2.6
NetP3_11: P3.11
NetP3_13: P3.13
NetP3_19: P3.19
NetP3_24: P3.24
NetP3_25: P3.25
NetP3_26: P3.26
NetP3_27: P3.27
NetP3_28: P3.28
NetP3_30: P3.30
NetP3_31: P3.31
NetP3_32: P3.32
NetP3_33: P3.33
NetP3_34: P3.34
NetP3_35: P3.35
NetP3_36: P3.36
NetP3_37: P3.37
NetP3_38: P3.38
NetP3_39: P3.39
NetP3_40: P3.40
NetP4_8: P4.8
NetP4_13: P4.13
NetP4_15: P4.15
NetP4_17: P4.17
NetP4_20: P4.20
NetP4_22: P4.22
NetP4_24: P4.24
NetP4_25: P4.25
NetP4_26: P4.26
NetP4_27: P4.27
NetP4_28: P4.28
NetP4_30: P4.30
NetP4_31: P4.31
NetP4_32: P4.32
NetP4_33: P4.33
NetP4_34: P4.34
NetP4_35: P4.35
NetP4_36: P4.36
NetP4_37: P4.37
NetP4_38: P4.38
NetP4_39: P4.39
NetP4_40: P4.40
NetR1_1: R1.1 R2.2 U1.1 | length 3.9
  Top Layer w0.25: R2.2 R1.1 15.787,6.451 U1.1
NetR3_2: R3.2 U1.5 | length 2.6
  Top Layer w0.25: R3.2 15.686,3.19 16.347,3.851 U1.5
RADIO_EN: IC5.3 P3.22 P5.9 R17.2 | length 36.6
  Top Layer w0.25: v2(17.653,26.797) 21.717,22.733 v2(22.606,22.733) ; IC5.3 29.657,25.085 R17.2 29.845,25.019 v2(29.845,22.987)
  Bottom Layer w0.25: P3.22 9.906,24.765 15.621,24.765 v2(17.653,26.797) ; v2(22.606,22.733) 29.591,22.733 v2(29.845,22.987) 30.734,22.098 30.734,19.812 P5.9
RADIO_VCC: C17.2 C18.2 IC5.1 P2.9 P5.7 | length 15.2
  Top Layer w0.25: P2.9 P2.9@24.511,20.828 ; C18.2@25.016,24.892 C18.2 C18.2@25.215,25.085 ; P5.7@29.337,16.002 P5.7
  Top Layer w0.4: C17.2 C18.2@25.016,24.892 ; C18.2@25.215,25.085 IC5.1
  Top Layer w0.5: P2.9 24.384,22.987 25.019,23.622 C18.2
  Bottom Layer w0.25: P2.9 24.511,20.828 29.337,16.002 P5.7
TPS_EN: IC1.3 IC3.4 P4.29 P5.11 R11.2 | length 34
  Top Layer w0.25: IC1.3 40.174,3.449 R11.2 40.263,3.368 IC3.4 42.149,2.051 42.295,1.905 45.085,1.905 47.625,4.445 47.625,13.462 ; P5.11 39.624,13.862 40.024,13.462 47.625,13.462 ; P4.29 47.625,13.462
V_HARVEST: C1.2 L1.1 P5.5 P5.6 U1.8 | length 25
  Top Layer w0.4: U1.8 24.148,3.851 24.777,3.222 L1.1 26.277,3.222 L1.1@26.333,3.166 ; P5.5 P5.6 ; L1.1@26.162,2.995 L1.1@26.333,3.166 ; C1.2 28.265,3.166 L1.1@26.333,3.166
  Top Layer w0.5: v2(26.162,1.778) L1.1@26.162,2.995
  Bottom Layer w0.5: v2(26.162,1.778) 26.162,15.24 P5.6
VCAP: C2.2 C8.2 C9.2 IC1.6 IC3.3 IC3.5 L2.2 P5.1 P5.2 R1.2 R10.2 U1.11 | length 67.1
  Top Layer w0.4: P5.1 P5.1@14.286,15.94 ; U1.11 23.327,5.801 23.622,6.096 C8.2 ; L2.2 36.361,5.922 IC1.6 ; v2(41.021,6.858) 41.059,6.896 R10.2@42.184,6.896 ; IC3.3 42.149,6.861 R10.2@42.184,6.896 ; R10.2 42.353,7.065 R10.2@42.184,6.896 ; IC3.5 44.249,3.368 44.272,3.391 44.92,3.391 v2(44.958,3.429)
  Top Layer w0.5: P5.1 P5.2 20.775,11.991 24.458,11.991 28.259,8.19 ; R1.2 P5.1@14.286,15.94 ; C2.2 C8.2 C9.2 28.259,8.19 ; L2.2 30.527,5.922 v2(30.226,6.223) 28.259,8.19
  Bottom Layer w0.4: v2(30.226,6.223) 30.48,5.969 40.129,5.969 41.018,6.858 v2(41.021,6.858) 44.412,3.467 44.92,3.467 v2(44.958,3.429)
VCC: C4.2 C5.2 C6.2 C7.2 C10.2 C16.2 C19.2 IC1.5 IC2.5 IC4.4 IC5.4 IC6.4 P3.1 P3.2 P3.3 P3.4 P3.5 P3.6 P4.1 P4.3 R4.2 R7.2 | length 169.6
  Top Layer w0.4: P3.4 P3.2 11.049,53.086 46.878,53.086 ; IC4.4 18.114,32.243 18.48,31.877 19.633,31.877 C10.2 v2(21.717,32.004) 26.162,32.004 29.718,28.448 29.718,26.986 29.749,26.955 28.082,26.955 IC5.4 ; v2(29.273,39.497) 33.971,39.497 C19.2 34.086,39.512 IC6.4 ; C4.2 32.545,7.968 38.637,7.968 R4.2 ; C7.2 37.238,7.782 37.238,6.049 IC1.5 ; v2(44.831,44.45) 44.846,44.465 IC2.5 ; R7.2 44.896,51.104 46.878,53.086 ; P4.3 P4.1 49.403,51.054 49.403,51.308 49.107,51.604 48.853,51.604 47.371,53.086 46.878,53.086
  Top Layer w0.5: v2(23.114,13.97) 25.708,13.97 31.742,7.936 C4.2
  Bottom Layer w0.4: P3.3 P3.5 P3.6 P3.4 ; P3.1@6.604,51.181 P3.1 P3.2 ; v2(21.717,32.004) 29.21,39.497 v2(29.273,39.497) 29.369,39.497 40.926,51.054 47.244,51.054 ; v2(44.831,44.45) 44.831,48.387 47.244,50.8 47.244,51.054 ; P4.1 47.244,51.054
  Bottom Layer w0.5: v2(21.717,32.004) 20.694,30.981 20.694,14.993 21.717,13.97 v2(23.114,13.97)
pads on no net: IC4.6 IC5.6 IC6.6 P1.1 P1.2 P1.3 P1.4 P1.5 P2.7 U1.2 U1.4 U1.10

## Polygon pours and split planes (outlines as drawn)
GND on Bottom Layer "Bottom Layer-GND" (solid, pour order 10): 0.127,57.277 58.547,57.277 58.547,0.127 0.127,0.127
GND on Top Layer "Top Layer-GND" (solid, pour order 8): 0.127,57.277 58.547,57.277 58.547,0.127 0.127,0.127

## Keep-outs
Keep-Out Layer:
  the board outline again, w0.254

## Silkscreen, mask and mechanical layers (free items; w line width, h text height)
Top Overlay:
  drawing of 1894 lines, arcs and shapes, not listed
  text "Abstract Lab / HD MN BL 2019" at 36.957,53.213 h0.81